# Altium PCB T1_MODIFYV1_0527.PCBDOC (part 1 of 6)
Units mm, origin at the board's own origin, x right, y up, seen from the top; angles counter-clockwise.
Board outline 1320.8 x 844.04 mm, 2 copper layers (Top Layer, Bottom Layer); 219 components, 215 nets, 1393 pads, 492 vias.
Unrouted connection lines stored in the file: 60.
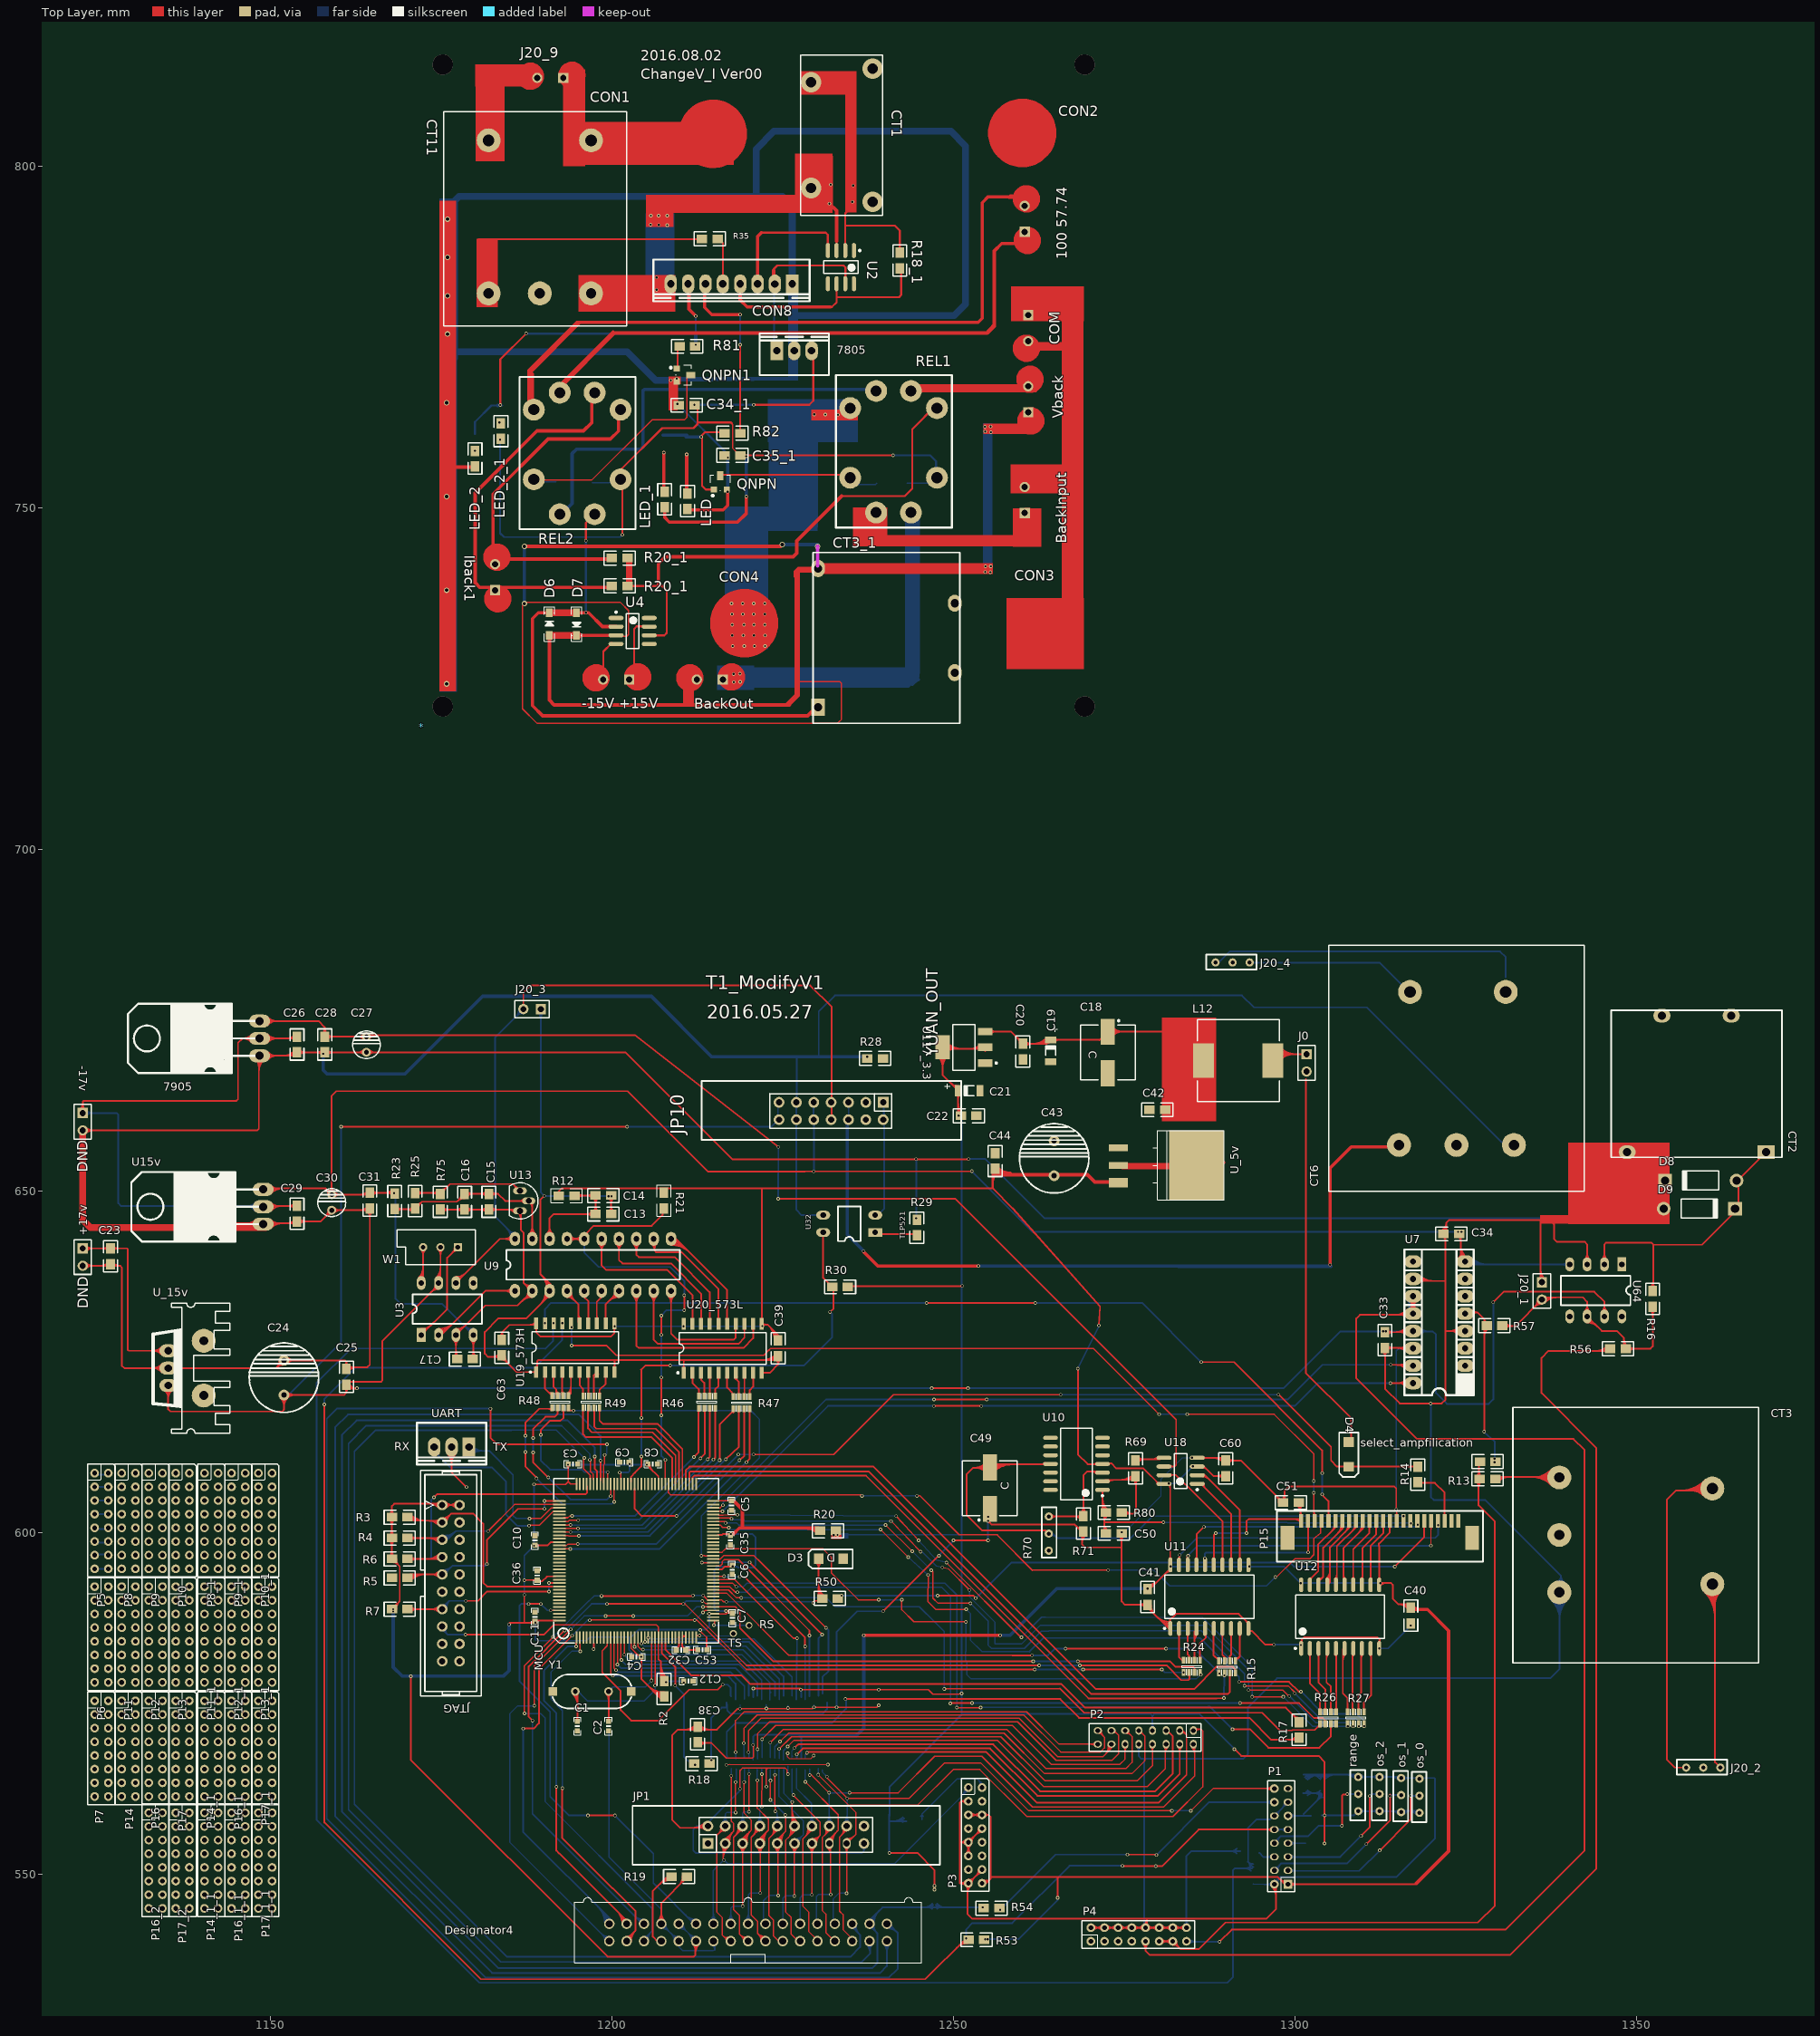
[diagram p0: Top Layer view]
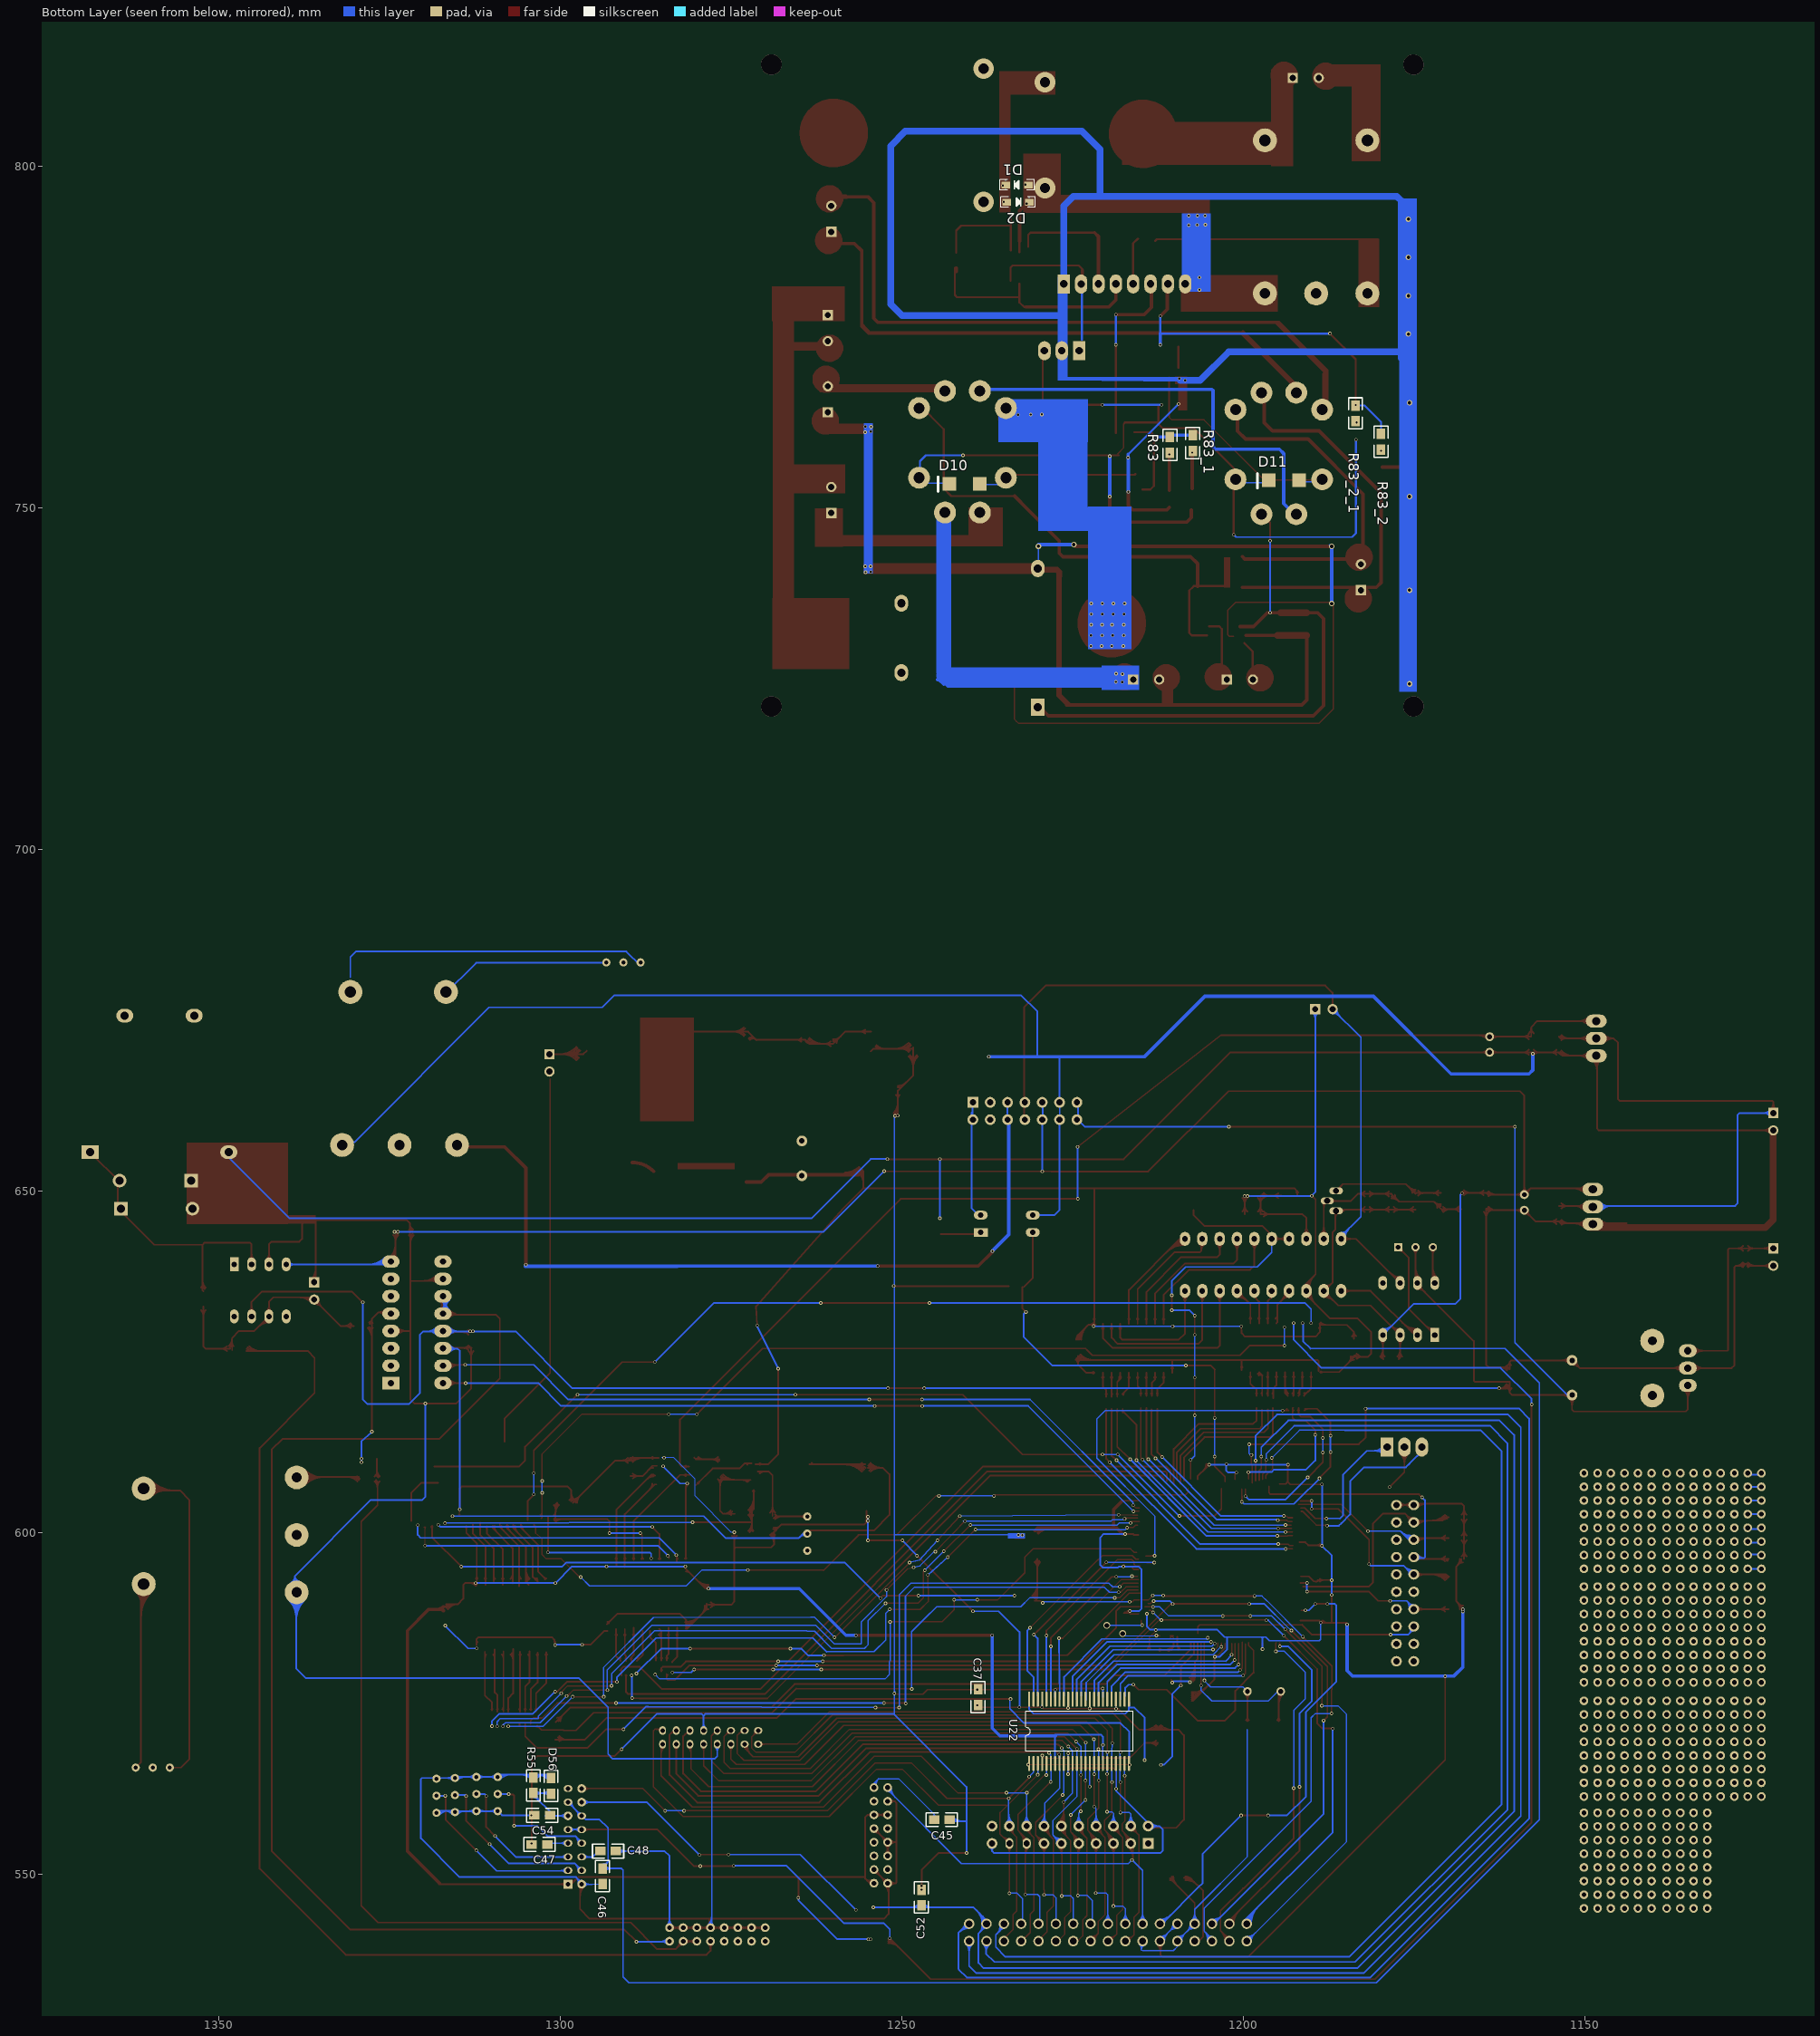
[diagram p1: Bottom Layer view, seen from below]

## Layer stack, top to bottom
Top Layer: signal copper 0.0356
Dielectric: dielectric 0.32, FR-4, Dk 4.8
Bottom Layer: signal copper 0.0356

## Board outline
476.758,980.821 1793.621,980.821 1795.526,978.916 1795.526,136.779 496.316,136.779 476.758,156.337 474.726,158.369 474.726,976.884

## Design rules (kind name [scope] priority, off if disabled: settings)
Clearance [All] p1: gap=0.254
PolygonConnect [All] p1: connectstyle=Relief reliefconductorwidth=0.254 reliefentries=4 polygonreliefangle="90 Angle"
RoomDefinition T1 [InComponentClass('T1')] p1: confinementstyle=ConfineIn formatcopy=TRUE lockcomponents=FALSE outline 0,0 50.8,0 50.8,25.4 0,25.4
RoutingVias [All] p1: holewidth=0.711 width=1.27 viastyle="Through Hole" minholewidth=0.711 minwidth=1.27 maxholewidth=0.711 maxwidth=1.27
SilkscreenOverComponentPads [All] p1: minsilkscreentomaskgap=0.254
SolderMaskExpansion [All] p1: expansion=0.102
TestPointUsage [All] p1: valid=0 allowmultiple=FALSE
Testpoint [All] p1: side=15 testpointundercomponent=TRUE minsize=1.016 maxsize=2.54 preferedsize=1.524 minholesize=0 maxholesize=1.016 preferedholesize=0.813 testpointgrid=0.025 style=1023 order=0-112345678
Width [All] p1: maxlimit=1 minlimit=0.1 preferedwidth=0.254 minimp=50.000000 maximp=50.000000 favimp=50.000000
23 further rules are at their usual default settings.

## Classes and differential pairs
component class T1: 7905 +17v -17v C1 C2 C3 C4 C5 C6 C7 C8 C9 C10 C11 C12 C13 C14 C15 C16 C17 C18 C19 C20 C21 C22 C23 C24 C25 C26 C27 C28 C29 C30 C31 C33 C34 C35 C36 C37 C38 C39 C40 C41 C42 C43 C44 C45 C46 C47 C48 C49 C50 C51 C52 C60 C63 CT2 CT3 D3 D8 D9 J0 J20_1 J20_2 J20_3 JP1 JTAG L12 MCU P1 P2 P3 P4 P15 R1 R2 R3 R4 R6 R7 R12 R13 R15 R16 R17 R19 R20 R23 R24 R25 R26 R27 R28 R46 R47 R48 R49 R50 R55 R56 R69 R70 R71 R75 R80 T1 TFTLCD1 U3 U7 U9 U10 U11 U12 U13 U15v U18 U19 U19_573H U20_573L U22 U64 U117_3.3 U_5v U_15v U_-5v uart W1 Y1

## Components (designator, comment, footprint, x,y, rotation, side; value= is the part's Value field where it differs from the comment)
"100 57.74" "Back" TWOPOWINT 1260.384,790.45 r90 top
7805 "Comment" CON3 1224.102,773.049 r0 top
7905 "7905" TO220H 1148.385,672.389 r90 top (schematic designator U_-5v)
* "Rect" RECTANGLE 1172.163,717.983 r0 top locked
+17v "k TX" HDR1X2 1122.477,641.655 r270 top (schematic designator J2)
"-15V +15V" "ac" TWOPOWINT 1202.472,724.918 r180 top
-17v "k TX" HDR1X2 1122.477,661.467 r270 top (schematic designator J3)
BackInput "ac" TWOPOWINT 1260.384,749.302 r90 top
BackOut "ac" TWOPOWINT 1216.188,724.918 r180 top
C1 "C" 0603P 1194.892,571.729 r90 top
C2 "C" 0603P 1199.464,571.729 r90 top
C3 "C" 0603P 1194.257,610.083 r180 top
C4 "C" 0603P 1203.528,581.889 r0 top
C5 "C" 0603P 1217.473,604.012 r90 top
C6 "C" 0603P 1217.549,594.614 r90 top
C7 "C" 0603P 1217.6,587.553 r90 top
C8 "C" 0603P 1205.941,610.083 r180 top
C9 "C" 0603P 1201.776,610.362 r0 top
C10 "C" 0603P 1188.669,598.907 r270 top
C11 "C" 0603P 1188.669,587.731 r270 top
C12 "C" 0603P 1211.148,578.333 r180 top
C13 "0.1" 0805 1197.559,646.684 r0 top
C14 "10u" 0805 1197.559,649.402 r0 top
C15 "0.1" 0805 1181.938,649.63 r270 top
C16 "10u" 0805 1178.382,649.63 r270 top
C17 "0.1" 0805 1177.29,625.45 r0 top
C18 "220u" C-RVE 1272.565,670.331 r270 top
C19 "10u" c-1206 1264.183,670.585 r270 top
C20 "0.1" 0805 1260.119,671.601 r270 top
C21 "10u" c-1206 1252.245,664.743 r0 top
C22 "0.1" 0805 1251.052,661.06 r0 top
C23 "0.1" 0805 1126.541,641.655 r270 top
C24 "220U" CD10 1151.941,620.192 r270 top
C25 "0.1" 0805 1161.085,621.716 r90 top
C26 "0.1" 0805 1153.846,670.357 r90 top
C27 "220U" CD4 1164.006,670.357 r270 top
C28 "0.1" 0805 1157.91,670.357 r90 top
C29 "0.1" 0805 1153.846,647.878 r270 top
C30 "220U" CD4 1158.926,647.243 r270 top
C31 "0.1" 0805 1164.514,649.783 r270 top
C32 "C" 0603P 1210.081,582.879 r180 top (schematic designator C7)
C33 "1u" 0805 1313.129,627.101 r90 top
C34 "1u" 0805 1321.687,643.787 r0 top
C34_1 "0.1" 0805 1212.037,765.073 r180 top (schematic designator C34)
C35 "C" 0603P 1217.295,598.932 r90 top
C35_1 "0.1" 0805 1218.728,757.734 r180 top (schematic designator C35)
C36 "C" 0603P 1189.025,593.776 r270 top
C37 "0.1" 0805 1238.91,574.827 r90 bottom
C38 "0.1" 0805 1212.494,569.366 r90 top
C39 "0.1" 0805 1224.28,625.881 r90 top
C40 "0.1u" 0805 1316.914,586.765 r90 top
C41 "0.1u" 0805 1278.382,589.483 r90 top
C42 "0.1" 0805 1280.947,661.949 r180 top
C43 "220U" CD10 1264.691,652.297 r270 top
C44 "0.1" 0805 1256.055,653.313 r90 top
C45 "0.1" 0805 1243.051,558.038 r0 bottom (schematic designator C37)
C46 "0.1" 0805 1293.876,548.615 r90 bottom (schematic designator C37)
C47 "0.1" 0805 1301.979,554.406 r0 bottom (schematic designator C37)
C48 "0.1" 0805 1291.92,553.441 r0 bottom (schematic designator C37)
C49 "100u/50V" C-RVE 1255.268,606.552 r90 top
C50 "0.1" 0805 1274.572,599.948 r180 top
C51 "0.1uF" 0805 1300.505,604.444 r180 top
C52 "0.1" 0805 1247.191,547.776 r270 bottom (schematic designator C37)
C53 "C" 0603P 1213.206,582.905 r180 top (schematic designator C4)
C54 "0.1" 0805 1301.572,558.673 r0 bottom (schematic designator C37)
C60 "0.1" 0805 1289.812,610.616 r270 top
C63 "0.1" 0805 1183.818,625.983 r90 top
COM "ac" TWOPOWINT 1260.892,778.258 r270 top
CON1 "CON1" POWINT 1218.728,808.738 r0 top
CON2 "CON1" POWINT 1264.006,808.863 r0 top
CON3 "CON1" POWINT 1266.988,735.586 r0 top
CON4 "CON1" POWINT 1223.3,737.11 r0 top
CON8 "CON8" CON8 1226.348,782.83 r180 top
CT1 "CT09" INDUCTER_1 1227.607,816.356 r90 top
CT2 "CT09" PCBComponent_1 1358.113,664.845 r180 top
CT3 "CT09" tra1 1338.656,591.312 r90 top
CT3_1 "CT09" INDUCTER_2 1240.064,732.03 r270 top (schematic designator CT3)
CT6 "CT09" tra1 1332.001,656.793 r180 top (schematic designator CT3)
CT11 "CT09" TRA1 1196.896,803.844 r180 top
D1 "1N4148" 1504D 1233.195,797.306 r180 bottom
D2 "1N4148" 1504D 1233.043,794.791 r0 bottom
D3 "3.3V" DO-36 1233.805,596.214 r180 top
D4 "3.3V" DO-36 1307.821,613.308 r270 top (schematic designator D3)
D6 "1N4148" 1504D 1190.788,733.046 r270 top
D7 "1N4148" 1504D 1194.756,733.021 r90 top
D8 "1N4148" DO-41 1359.357,651.586 r180 top
D9 "1N4148" DO-41 1359.154,647.471 r0 top
D10 "DIODE" DiodeSVC 1242.698,753.448 r0 bottom
D11 "DIODE" DiodeSVC 1195.962,753.956 r0 bottom
D56 "0.1" 0805 1301.42,561.823 r90 bottom (schematic designator C37)
Designator4 "Comment" IDC34S 1199.566,540.258 r90 top
Iback1 "ac" TWOPOWINT 1182.853,737.997 r90 top (schematic designator Vback)
J0 "k TX" HDR1X2 1301.648,670.077 r270 top
J20_1 "DDL_BV" HDR1X2 1336.091,636.702 r270 top
J20_2 "ac" RESVR 1362.227,565.658 r180 top
J20_3 "ac" HDR1X2 1189.533,676.681 r180 top
J20_4 "ac" RESVR 1293.317,683.514 r180 top (schematic designator J20_2)
J20_9 "ac" TWOPOWINT 1192.832,812.988 r180 top
JP1 "TO_7606" IDC20_1 1225.474,555.752 r0 top
JP10 "YUAN_OUT" IDC14 1232.061,661.784 r180 top (schematic designator P13)
JTAG "" JTAG_20 1176.376,592.658 r270 top
L12 "100uH" L1212 1291.641,669.138 r0 top
LED "1K" 0805 1211.021,752.17 r270 top (schematic designator R81)
LED_1 "1K" 0805 1207.668,752.424 r270 top (schematic designator R81)
LED_2 "1K" 0805 1179.906,758.393 r270 top (schematic designator R81)
LED_2_1 "1K" 0805 1183.691,762.432 r270 top (schematic designator R81)
MCU "STM32F103ZET6" LQFP144 1194.765,584.683 r90 top
os_0 "ac" RESVR 1318.184,564.032 r270 top (schematic designator J20_2)
os_1 "ac" RESVR 1315.491,564.134 r270 top (schematic designator J20_2)
os_2 "ac" RESVR 1312.342,564.286 r270 top (schematic designator J20_2)
P1 "Part-A" PARTA 1298.931,548.589 r90 top
P2 "Part-B" PARTB 1285.082,571.078 r180 top
P3 "Part-C" Part-C 1252.134,562.729 r270 top
P4 "Part-D" Part-D 1270.067,540.229 r0 top
P5 "Part-C" Part-C 1124.22,608.754 r270 top (schematic designator P3)
P6 "Part-C" Part-C 1124.22,592.142 r270 top (schematic designator P3)
P7 "Part-C" Part-C 1124.22,575.429 r270 top (schematic designator P3)
P8 "Part-C" Part-C 1128.182,608.754 r270 top (schematic designator P3)
P8_1 "Part-C" Part-C 1140.298,608.754 r270 top (schematic designator P3)
P9 "Part-C" Part-C 1132.145,608.754 r270 top (schematic designator P3)
P9_1 "Part-C" Part-C 1144.261,608.754 r270 top (schematic designator P3)
P10 "Part-C" Part-C 1136.082,608.754 r270 top (schematic designator P3)
P10_1 "Part-C" Part-C 1148.198,608.754 r270 top (schematic designator P3)
P11 "Part-C" Part-C 1128.182,592.142 r270 top (schematic designator P3)
P11_1 "Part-C" Part-C 1140.298,592.142 r270 top (schematic designator P3)
P12 "Part-C" Part-C 1132.145,592.142 r270 top (schematic designator P3)
P12_1 "Part-C" Part-C 1144.261,592.142 r270 top (schematic designator P3)
P13 "Part-C" Part-C 1136.082,592.142 r270 top (schematic designator P3)
P13_1 "Part-C" Part-C 1148.198,592.142 r270 top (schematic designator P3)
P14 "Part-C" Part-C 1128.182,575.429 r270 top (schematic designator P3)
P14_1 "Part-C" Part-C 1140.298,575.429 r270 top (schematic designator P3)
P14_1_1 "Part-C" Part-C 1140.298,559.046 r270 top (schematic designator P3)
P15 "SED1335" LCD_CM 1297.534,602.717 r0 top
P16 "Part-C" Part-C 1132.145,575.429 r270 top (schematic designator P3)
P16_1 "Part-C" Part-C 1144.261,575.429 r270 top (schematic designator P3)
P16_1_1 "Part-C" Part-C 1144.261,559.046 r270 top (schematic designator P3)
P16_2 "Part-C" Part-C 1132.145,559.046 r270 top (schematic designator P3)
P17 "Part-C" Part-C 1136.082,575.429 r270 top (schematic designator P3)
P17_1 "Part-C" Part-C 1148.198,575.429 r270 top (schematic designator P3)
P17_1_1 "Part-C" Part-C 1148.198,559.046 r270 top (schematic designator P3)
P17_2 "Part-C" Part-C 1136.082,559.046 r270 top (schematic designator P3)
QNPN "NPN1" SOT-23 1214.664,753.874 r90 top
QNPN1 "NPN1" SOT-23 1210.6,770.638 r0 top
R2 "R" 0805 1207.592,578.333 r270 top
R3 "10K" 0805 1167.74,602.31 r0 top
R4 "10K" 0805 1167.74,599.262 r0 top
R5 "10K" 0805 1167.74,593.42 r0 top
R6 "10K" 0805 1167.74,596.214 r0 top
R7 "10K" 0805 1167.74,588.848 r0 top
R12 "100" 0805 1192.174,649.376 r0 top
R13 "0K" 0805 1329.284,607.924 r180 top
R14 "0K" 0805 1317.93,609.702 r270 top (schematic designator R13)
R15 "470" 8P4R_0603 1288.834,579.501 r90 top
R16 "1K" 0805 1352.321,635.406 r270 top
R17 "470" 0805 1300.556,570.027 r90 top
R18 "470" 0805 1214.247,566.242 r180 top
R18_1 "1K" 0805 1242.096,787.402 r270 top (schematic designator R18)
R19 "470" 0805 1210.945,549.707 r180 top (schematic designator R18)
R20 "0" 0805 1230.452,600.329 r0 top
R20_1 "1K" 0805 1199.932,742.698 r0 top (schematic designator R20)
R20_1 "200" 0805 1199.932,738.634 r0 top
R21 "100" 0805 1207.567,649.783 r270 top (schematic designator R12)
R23 "1k" 0805 1168.146,649.707 r270 top
R24 "470" 8P4R_0603 1283.653,579.577 r90 top
R25 "2k" 0805 1171.143,647.471 r90 top
R26 "470" 8P4R_0603 1303.604,572.059 r90 top
R27 "470" 8P4R_0603 1307.668,572.059 r90 top
R28 "0" 0805 1239.622,669.468 r180 top
R29 "0" 0805 1244.6,645.846 r270 top (schematic designator R28)
R30 "0" 0805 1232.205,636.016 r0 top (schematic designator R28)
R35 "0K" 0805 1213.14,789.434 r0 top
R46 "33" 8P4R_0603 1212.672,618.261 r90 top
R47 "33" 8P4R_0603 1217.727,618.185 r90 top
R48 "33" 8P4R_0603 1191.184,618.312 r90 top
R49 "33" 8P4R_0603 1195.73,618.287 r90 top
R50 "470" 0805 1233.018,590.423 r180 top
R53 "0.1" 0805 1254.455,540.461 r180 top (schematic designator C37)
R54 "0.1" 0805 1256.665,545.084 r180 top (schematic designator C37)
R55 "0.1" 0805 1304.011,561.924 r90 bottom (schematic designator C37)
R56 "0" 0805 1348.384,626.974 r180 top
R57 "0" 0805 1330.3,630.352 r180 top (schematic designator R56)
R69 "47K" 0805 1276.604,610.616 r270 top
R70 "RESVR" RESVR 1263.904,597.408 r90 top
R71 "47K" 0805 1268.984,602.488 r270 top
R75 "3k" 0805 1174.826,649.63 r270 top
R80 "15K" 0805 1274.572,602.996 r180 top
R81 "1K" 0805 1212.124,773.686 r180 top
R82 "1K" 0805 1218.728,760.986 r180 top
R83 "1K" 0805 1210.818,758.139 r90 bottom (schematic designator R82)
R83_1 "1K" 0805 1207.465,758.393 r90 bottom (schematic designator R82)
R83_2 "1K" 0805 1179.906,758.596 r90 bottom (schematic designator R82)
R83_2_1 "1K" 0805 1183.64,762.737 r90 bottom (schematic designator R82)
range "ac" RESVR 1309.218,564.286 r270 top (schematic designator J20_2)
REL1 "RELAY1" N4099-5D 1238.634,754.464 r0 top
REL2 "RELAY2" N4099-5D 1192.312,754.222 r0 top
select_ampfilication "0K" 0805 1329.309,610.438 r180 top (schematic designator R13)
U2 "OP07CP" SOP127P600X175-8N 1233.475,785.292 r270 top
U3 "OP07" DIP8 1172.032,628.98 r90 top
U4 "OP07CP" SOP127P600X175-8N 1202.98,732.03 r0 top
U7 "PGA204" DIP16 1324.864,621.944 r90 top
U9 "AD7545" DIP20 1185.748,635.432 r90 top
U10 "LM324" SOP-14 1267.968,610.108 r180 top
U11 "74HC573" SO20-7.5 1287.424,590.677 r90 top
U12 "74HC573" SO20-7.5 1306.576,587.756 r90 top
U13 "431" 29-04 1186.485,648.614 r180 top
U15v "7915" TO220H 1148.893,647.751 r90 top
U18 "X9C503" SOP127P600X175-8N 1283.208,609.092 r180 top
U19_573H "74HCT573" M20D 1194.587,627.126 r0 top
U20_573L "74HCT573" M20D 1216.177,627.024 r0 top
U22 "SN74ALVC164245" SSOP48 1231.417,566.268 r90 bottom
U32 "TLP521" DIP4 1238.504,643.992 r180 top (schematic designator U30)
U64 "OP07CP" DIP8 1347.8,639.318 r270 top
U117_3.3 "LM1117-33" SOT223 1251.483,671.093 r90 top
U_5v "LD1086D2M33" D2PAK/A 1285.519,653.821 r180 top
U_15v "LD1086D2M33" TO220F 1137.59,624.129 r270 top
UART "Comment" CON3 1179.017,612.572 r180 top
Vback "ac" TWOPOWINT 1260.892,764.034 r90 top
W1 "50K" VR5 1174.852,641.833 r180 top
Y1 "XTAL" XTAL_US 1199.464,576.809 r180 top

## Footprints (in the part's own frame and the unit in brackets; to place one, negate y for a bottom-side part, rotate by r counter-clockwise, add the part's x,y. Pads: shape width x height; smd on the part's side, far side on the other; paste and mask are expansions set on the pad)
8P4R_0603 [mm]
  rect 1x0.5 smd: 1(0,0) 2(0,-0.8) 3(0,-1.6) 4(0,-2.4) 5(1.778,-2.4) 6(1.778,-1.6) 7(1.778,-0.8) 8(1.778,0)
  silkscreen extent -0.43,-2.67 2.18,0.25
29-04 [mm] "TO, Flat Index; 3 In-Line, Axial Leads; Body Dia. 4.8mm; Leads 0.48 x 0.51 mm (max)"
  oval 2x1 hole 0.9: 1(0,-1.47) 3(0,1.47)
  oval 1.9x1 hole 0.9: 2(-1.288,0)
  silkscreen extent -2.65,-2.65 1.55,2.65
0603P [mil]
  rect 30x30 smd: 1(-27,0) 2(27.5,-0.06)
  silkscreen extent -50,-20 50,20
0805 [mil]
  rect 60x50 smd: 1(0,0) 2(90,0)
  silkscreen extent -45,-40 135,40
1504D [mil]
  rect 50x40 smd: 1(65,0) 2(-65,0)
  silkscreen extent -99,-30 100,30
c-1206 [mm] "Chip Inductor, 2-Leads, Body 3.2x1.6mm, IPC Medium Density"
  rect 1x1.7 smd: 1(-1.6,0) 2(1.6,0)
  silkscreen extent -3.56,-0.75 0.7,1.02, body extent -1.6,-0.8 1.6,0.8, height 0.6
C-RVE [mm] "Precision Wire Wound Inductor, 2-Leads, Body 8.0x8.0mm, IPC Medium Density"
  rect 3.8x2.05 smd: 1(-3.048,0) 2(3.048,0)
  silkscreen extent -4.77,-4 4,4, body extent -4,-4 4,4, height 10.3
CD4 [mm]
  round 1.3 hole 0.7: 1(0,0) 2(-2.286,0)
  silkscreen extent -3.16,-2.04 0.92,2.04
CD10 [mil]
  round 62 hole 31.5: 1(0,0) 2(-200,0)
  silkscreen extent -300,-200 100,200
CON3 [mil]
  rect 72x110 hole 43.31: 1(0,0)
  oval 72x110 hole 43.31: 2(100,0) 3(200,0)
  silkscreen extent -100,-140 300,100
CON8 [mm]
  rect 1.8x2.8 hole 1.1: 1(0,0)
  oval 1.8x2.8 hole 1.1: 2(2.54,0.02) 3(5.08,0) 4(7.62,0) 5(10.16,0) 6(12.7,0) 7(15.24,0) 8(17.78,0)
  silkscreen extent -2.54,-3.56 20.32,2.54
D2PAK/A [mm]
  rect 2.8x1 smd: 1(11.4,-2.54) 2(11.4,0)
  rect 8x10.2 smd: 2(0,0)
  rect 2.8x1.42 smd: 3(11.4,2.54)
  silkscreen extent -4.06,-5.08 6.35,5.08
DiodeSVC [mm]
  rect 2x2 smd: 1(-4.064,-0.127) 2(0.381,-0.127)
  silkscreen extent 2.03,-1.14 2.03,1.02
DIP4 [mil]
  rect 80x50 hole 32: 1(0,0)
  oval 80x50 hole 32: 2(0,-100) 3(300,-100) 4(300,0)
  silkscreen extent 85,-150 215,50
DIP8 [mil]
  rect 80x50 hole 32: 1(0,0)
  oval 80x50 hole 32: 2(0,-100) 3(0,-200) 4(0,-300) 5(300,-300) 6(300,-200) 7(300,-100) 8(300,0)
  silkscreen extent 65,-350 235,50
DIP16 [mm]
  rect 1.829x2.54 hole 0.9: 1(0,0)
  oval 1.829x2.54 hole 0.9: 2(2.54,0) 3(5.08,0) 4(7.62,0) 5(10.16,0) 6(12.7,0) 7(15.24,0) 8(17.78,0) 9(17.78,7.62) 10(15.24,7.62) 11(12.7,7.62) 12(10.16,7.62) 13(7.62,7.62) 14(5.08,7.62) 15(2.54,7.62) 16(0,7.62)
  silkscreen extent -1.78,-1.27 19.56,8.89
DIP20 [mil]
  oval 80x60 hole 32: 1(0,0) 2(0,-100) 3(0,-200) 4(0,-300) 5(0,-400) 6(0,-500) 7(0,-600) 8(0,-700) 9(0,-800) 10(0,-900) 11(300,-900) 12(300,-800) 13(300,-700) 14(300,-600) 15(300,-500) 16(300,-400) 17(300,-300) 18(300,-200) 19(300,-100) 20(300,0)
  silkscreen extent 65,-950 235,50
DO-36 [mm]
  rect 1.4x1.5 smd: 1(0,0) 2(3.6,0)
  silkscreen extent -1.4,-1.4 5.08,1.4
DO-41 [mm] "Diode, Axial; Body 5.2 x 2.7 mm (LxDia. max), Lead Dia. 0.86 mm (max)"
  round 2 hole 1.2: 1(-5.23,0)
  rect 2x2 hole 1.2: 2(5.23,0)
  silkscreen extent -2.65,-1.41 2.74,1.4
HDR1X2 [mm] "Connector; Header; 2 Position"
  rect 1.5x1.5 hole 0.9: 1(0,0)
  round 1.5 hole 0.9: 2(2.54,0)
  silkscreen extent -1.27,-1.27 3.81,1.27
IDC14 [mm]
  rect 1.575x1.575 hole 0.9: 1(-7.601,-1.25)
  round 1.575 hole 0.9: 2(-7.601,1.29) 3(-5.061,-1.25) 4(-5.061,1.29) 5(-2.521,-1.25) 6(-2.521,1.29) 7(0.019,-1.25) 8(0.019,1.29) 9(2.559,-1.25) 10(2.559,1.29) 11(5.099,-1.25) 12(5.099,1.29) 13(7.639,-1.25) 14(7.639,1.29)
  silkscreen extent -19,-4.35 19,4.25
IDC20_1 [mm]
  rect 1.575x1.575 hole 0.9: 1(-11.476,-1.2)
  round 1.575 hole 0.9: 2(-11.476,1.34) 3(-8.936,-1.2) 4(-8.936,1.34) 5(-6.396,-1.2) 6(-6.396,1.34) 7(-3.856,-1.2) 8(-3.856,1.34) 9(-1.316,-1.2) 10(-1.316,1.34) 11(1.224,-1.2) 12(1.224,1.34) 13(3.764,-1.2) 14(3.764,1.34) 16(6.304,1.34) 18(8.844,1.34) 19(11.384,-1.2) 20(11.384,1.34)
  oval 1.2x1.575 hole 0.9: 15(6.304,-1.2)
  oval 1.15x1.575 hole 0.9: 17(8.844,-1.2)
  silkscreen extent -22.5,-4.3 22.5,4.3
IDC34S [mil]
  round 60 hole 40: bl(100,-500) clk(0,0) cs(100,-1600) d0(0,-1400) d1(100,-1300) d2(0,-1300) d3(100,-1200) d4(0,-1200) d5(100,-1100) d6(0,-1100) d7(100,-1000) d8(0,-1000) d9(100,-900) d10(0,-900) d11(100,-800) d12(0,-800) d13(100,-700) d14(0,-700) d15(100,-600) gnd(0,-400) gnd(0,-600) gnd(100,-300) mi(100,-200) mo(0,-200) nc(0,-100) pen(100,-100) rd(0,-1500) rs(0,-1600) rst(100,-1400) tcs(100,0) v5(0,-300) vdd(0,-500) vdd(100,-400) wr(100,-1500)
  silkscreen extent -125,-1800 250,200
INDUCTER_1 [mm]
  silkscreen extent -23.49,-12 0.01,0
INDUCTER_2 [mm]
  rect 2.5x2 hole 1.2: 1(11.176,-9.919)
  oval 2.5x2 hole 1.2: 2(-9.144,-9.919) 3(-4.064,10.071) 4(6.096,10.071)
  silkscreen extent -11.48,-10.67 13.52,10.83
JTAG_20 [mm]
  oval 1.5x1.575 hole 0.9: 1(-11.43,-1.27) 2(-11.43,1.27) 3(-8.89,-1.27) 4(-8.89,1.27) 5(-6.35,-1.27) 6(-6.35,1.27) 7(-3.81,-1.27) 8(-3.81,1.27) 9(-1.27,-1.27) 10(-1.27,1.27) 11(1.27,-1.27) 12(1.27,1.27) 13(3.81,-1.27) 14(3.81,1.27) 15(6.35,-1.27) 16(6.35,1.27) 17(8.89,-1.27) 18(8.89,1.27) 19(11.43,-1.27) 20(11.43,1.27)
  silkscreen extent -16.51,-4.45 16.51,4.45
L1212 [mm] "Precision Wire Wound Inductor, 2-Leads, Body 12.0x12.0mm, IPC Medium Density"
  rect 3x5.05 smd: 1(-5.075,0) 2(5.075,0)
  silkscreen extent -6,-6 6,6, body extent -6,-6 6,6, height 8
LCD_CM [mm] "LCD_CM"
  rect 2x3.5 smd: 0(1.331,-3.41) 0(28.331,-3.41)
  rect 0.6x2 smd: 1(3.331,-0.957) 2(4.331,-0.957) 3(5.331,-0.957) 4(6.331,-0.957) 5(7.331,-0.957) 6(8.331,-0.957) 7(9.331,-0.957) 8(10.331,-0.957) 9(11.331,-0.957) 10(12.331,-0.957) 11(13.331,-0.957) 12(14.331,-0.957) 13(15.331,-0.957) 14(16.331,-0.957) 15(17.331,-0.957) 16(18.331,-0.957) 17(19.331,-0.957) 18(20.331,-0.957) 19(21.331,-0.957) 20(22.331,-0.957) 21(23.331,-0.957) 22(24.331,-0.957) 23(25.331,-0.957) 24(26.331,-0.957)
  silkscreen extent -0.25,-6.91 29.97,0.51
LQFP144 [mm]
  rect 1.8x0.254 smd: 1(-0.009,0.001) 2(-0.009,-0.499) 3(-0.009,-0.999) 4(-0.009,-1.499) 5(-0.009,-1.999) 6(-0.009,-2.499) 7(-0.009,-2.999) 8(-0.009,-3.499) 9(-0.009,-3.999) 10(-0.009,-4.499) 11(-0.009,-4.999) 12(-0.009,-5.499) 13(-0.009,-5.999) 14(-0.009,-6.499) 15(-0.009,-6.999) 16(-0.009,-7.499) 17(-0.009,-7.999) 18(-0.009,-8.499) 19(-0.009,-8.999) 20(-0.009,-9.499) 21(-0.009,-9.999) 22(-0.009,-10.499) 23(-0.009,-10.999) 24(-0.009,-11.499) 25(-0.009,-11.999) 26(-0.009,-12.499) 27(-0.009,-12.999) 28(-0.009,-13.499) 29(-0.009,-13.999) 30(-0.009,-14.499) 31(-0.009,-14.999) 32(-0.009,-15.499) 33(-0.009,-15.999) 34(-0.009,-16.499) 35(-0.009,-16.999) 36(-0.009,-17.499) 73(22.491,-17.499) 74(22.491,-16.999) 75(22.491,-16.499) 76(22.491,-15.999) 77(22.491,-15.499) 78(22.491,-14.999) 79(22.491,-14.499) 80(22.491,-13.999) 81(22.491,-13.499) 82(22.491,-12.999) 83(22.491,-12.499) 84(22.491,-11.999) 85(22.491,-11.499) 86(22.491,-10.999) 87(22.491,-10.499) 88(22.491,-9.999) 89(22.491,-9.499) 90(22.491,-8.999) 91(22.491,-8.499) 92(22.491,-7.999) 93(22.491,-7.499) 94(22.491,-6.999) 95(22.491,-6.499) 96(22.491,-5.999) 97(22.491,-5.499) 98(22.491,-4.999) 99(22.491,-4.499) 100(22.491,-3.999) 101(22.491,-3.499) 102_ADBURY(22.491,-2.999) 103(22.491,-2.499) 104(22.491,-1.999) 105(22.491,-1.499) 106(22.491,-0.999) 107(22.491,-0.499) 108(22.491,0.001)
  rect 0.254x1.8 smd: 37(2.491,-19.999) 38(2.991,-19.999) 39(3.491,-19.999) 40(3.991,-19.999) 41(4.491,-19.999) 42(4.991,-19.999) 43(5.491,-19.999) 44(5.991,-19.999) 45(6.491,-19.999) 46(6.991,-19.999) 47(7.491,-19.999) 48(7.991,-19.999) 49(8.491,-19.999) 50(8.991,-19.999) 51(9.491,-19.999) 52(9.991,-19.999) 53(10.491,-19.999) 54(10.991,-19.999) 55(11.491,-19.999) 56(11.991,-19.999) 57(12.491,-19.999) 58(12.991,-19.999) 59(13.491,-19.999) 60(13.991,-19.999) 61(14.491,-19.999) 62(14.991,-19.999) 63(15.491,-19.999) 64(15.991,-19.999) 65(16.491,-19.999) 66(16.991,-19.999) 67(17.491,-19.999) 68(17.991,-19.999) 69(18.491,-19.999) 70(18.991,-19.999) 71(19.491,-19.999) 72(19.991,-19.999) 109(19.991,2.501) 110(19.491,2.501) 111(18.991,2.501) 112(18.491,2.501) 113(17.991,2.501) 114(17.491,2.501) 115(16.991,2.501) 116(16.491,2.501) 117(15.991,2.501) 118(15.491,2.501) 119(14.991,2.501) 120(14.491,2.501) 121(13.991,2.501) 122(13.491,2.501) 123(12.991,2.501) 124(12.491,2.501) 125(11.991,2.501) 126(11.491,2.501) 127(10.991,2.501) 128(10.491,2.501) 129(9.991,2.501) 130(9.491,2.501) 131(8.991,2.501) 132(8.491,2.501) 133(7.991,2.501) 134(7.491,2.501) 135(6.991,2.501) 136(6.491,2.501) 137(5.991,2.501) 138(5.491,2.501) 139(4.991,2.501) 140(4.491,2.501) 141(3.991,2.501) 142(3.491,2.501) 143(2.991,2.501) 144(2.491,2.501)
  silkscreen extent -0.81,-20.8 23.29,3.3
M20D [mm] "Small Outline; 20 Leads; Body Width 5.3 mm; Pitch 1.27 mm"
  rect 0.6x1.7 smd: 1(-5.715,-3.575) 2(-4.445,-3.575) 3(-3.175,-3.575) 4(-1.905,-3.575) 5(-0.635,-3.575) 6(0.635,-3.575) 7(1.905,-3.575) 8(3.175,-3.575) 9(4.445,-3.575) 10(5.715,-3.575) 11(5.715,3.575) 12(4.445,3.575) 13(3.175,3.575) 14(1.905,3.575) 15(0.635,3.575) 16(-0.635,3.575) 17(-1.905,3.575) 18(-3.175,3.575) 19(-4.445,3.575) 20(-5.715,3.575)
  silkscreen extent -6.69,-3.7 6.35,2.33
N4099-5D [mm]
  round 3.2 hole 1.6: 1(0,-5.1) 2(-3.8,10.2) 3(0,12.7) 4(5.1,-5.1) 5(8.9,10.2) 6(5.1,12.7) 8(8.9,0)
  round 3.2 hole 1.6 paste+0: 7(-3.8,0)
  silkscreen extent -5.9,-7.29 11.08,15.01
Part-C [mm] "Part-C"
  round 1.27 hole 0.7: 33(0,0) 34(0,2) 35(2,0) 36(2,2) 37(4,0) 38(4,2) 39(6,0) 40(6,2) 41(8,0) 42(8,2) 43(10,0) 44(10,2) 45(12,0) 46(12,2) 47(14,0) 48(14,2)
  silkscreen extent -1.32,-1 15.19,3
Part-D [mm] "Part-D"
  round 1.27 hole 0.7: 49(0,0) 50(0,2) 51(2,0) 52(2,2) 53(4,0) 54(4,2) 55(6,0) 56(6,2) 57(8,0) 58(8,2) 59(10,0) 60(10,2) 61(12,0) 62(12,2) 63(14,0) 64(14,2)
  silkscreen extent -1.32,-1 15.19,3
PARTA [mm] "PARTA"
  rect 1.27x1.27 hole 0.7: 1(0,0)
  round 1.27 hole 0.7: 2(0,2) 11(10,0) 14(12,2) 16(14,2)
  oval 1x1.27 hole 0.7: 3(2,0) 4(2,2) 5(4,0) 6(4,2) 7(6,0) 8(6,2) 9(8,0) 10(8,2) 12(10,2) 13(12,0) 15(14,0)
  silkscreen extent -1.12,-1 15.14,3
PARTB [mm] "PARTB"
  oval 1x1.27 hole 0.7: 17(0,0) 18(0,2) 19(2,0) 20(2,2) 21(4,0) 22(4,2) 23(6,0) 24(6,2) 26(8,2) 28(10,2)
  oval 1x1.2 hole 0.7: 25(8,0)
  oval 1.2x1 hole 0.7: 27(10,0) 29(12,0) 30(12,2) 31(14,0) 32(14,2)
  silkscreen extent -1.12,-1 15.27,3
PCBComponent_1 [mm]
  rect 2.5x2 hole 1.2: 1(-10.795,9.106)
  oval 2.5x2 hole 1.2: 2(9.525,9.106) 3(4.445,-10.884) 4(-5.715,-10.884)
  silkscreen extent -13.14,-11.64 11.87,9.86
POWINT [mm]
  Top Layer circle w5: c-3.984,-3.937 r2.5
RECTANGLE [mm]
RESVR [mm]
  round 1.2 hole 0.6: 0(0,0) 1(2.5,0) 2(5,0)
  silkscreen extent -1.02,-1.14 6.35,1.02
SO20-7.5 [mm] "SOIC, 20-Leads, Body 13.0x7.4mm (max), Pitch 1.27mm, IPC Medium Density"
  oval 2.15x0.6 smd: 1(-4.65,5.715) 2(-4.65,4.445) 3(-4.65,3.175) 4(-4.65,1.905) 5(-4.65,0.635) 6(-4.65,-0.635) 7(-4.65,-1.905) 8(-4.65,-3.175) 9(-4.65,-4.445) 10(-4.65,-5.715) 11(4.65,-5.715) 12(4.65,-4.445) 13(4.65,-3.175) 14(4.65,-1.905) 15(4.65,-0.635) 16(4.65,0.635) 17(4.65,1.905) 18(4.65,3.175) 19(4.65,4.445) 20(4.65,5.715)
  silkscreen extent -4.77,-6.5 3.18,6.69, body extent -3.7,-6.5 3.7,6.5, height 2.65
SOP127P600X175-8N [mm] "SOP, 8-Leads, Body 5.1x4.0mm (max), Pitch 1.27mm, IPC Medium Density"
  oval 2.2x0.6 smd: 1(-2.425,1.905) 2(-2.425,0.635) 3(-2.425,-0.635) 4(-2.425,-1.905) 5(2.425,-1.905) 6(2.425,-0.635) 7(2.425,0.635) 8(2.425,1.905)
  silkscreen extent -2.55,-2.55 0.93,2.88, body extent -2,-2.55 2,2.55, height 1.75
SOP-14 [mm] "SOP, 14-Leads, Body 10.5x5.6mm (max), Pitch 1.27mm, IPC Medium Density"
  oval 2.15x0.6 smd: 1(-3.8,3.81) 2(-3.8,2.54) 3(-3.8,1.27) 4(-3.8,0) 5(-3.8,-1.27) 6(-3.8,-2.54) 7(-3.8,-3.81) 8(3.8,-3.81) 9(3.8,-2.54) 10(3.8,-1.27) 11(3.8,0) 12(3.8,1.27) 13(3.8,2.54) 14(3.8,3.81)
  silkscreen extent -3.93,-5.25 2.33,5.25, body extent -2.8,-5.25 2.8,5.25, height 2
SOT223 [mm] "SOT-223/SC-73; 4 Leads; Body 6.7 x 7.3 mm, inc. leads (LxW max)"
  rect 1.1x2.15 smd: 1(-2.3,-3.1) 2(0,-3.1) 3(2.3,-3.1)
  rect 3.5x2.15 smd: 4(0,3.1)
  silkscreen extent -3.35,-4.85 3.35,1.63
SOT-23 [mil]
  rect 36x36 smd: 1(-45,-7.5) 2(-45,-82.5)
  rect 50x36 smd: 3(35,-45.5)
  silkscreen extent -80,-102 40,13
SSOP48 [mil]
  oval 87x12 smd: 1(0,0) 2(0,-25) 3(0,-50) 4(0,-75) 5(0,-100) 6(0,-125) 7(0,-150) 8(0,-175) 9(0,-200) 10(0,-225) 11(0,-250) 12(0,-275) 13(0,-300) 14(0,-325) 15(0,-350) 16(0,-375) 17(0,-400) 18(0,-425) 19(0,-450) 20(0,-475) 21(0,-500) 22(0,-525) 23(0,-550) 24(0,-575) 25(370,-575) 26(370,-550) 27(370,-525) 28(370,-500) 29(370,-475) 30(370,-450) 31(370,-425) 32(370,-400) 33(370,-375) 34(370,-350) 35(370,-325) 36(370,-300) 37(370,-275) 38(370,-250) 39(370,-225) 40(370,-200) 41(370,-175) 42(370,-150) 43(370,-125) 44(370,-100) 45(370,-75) 46(370,-50) 47(370,-25) 48(370,0)
  silkscreen extent 70,-600 300,20
TO220F [mm]
  oval 1.905x2.6 hole 1.1: 1(-2.54,-2.6) 2(0,-2.6) 3(2.54,-2.6)
  round 3.5 hole 1.3: 2(-4,2.6) 2(4,2.6)
  silkscreen extent -9.5,-4.8 9.5,6.4
TO220H [mm]
  oval 1.905x3.048 hole 1.2: 1(-2.54,0) 2(0,0) 3(2.54,0)
  silkscreen extent -5.08,0.76 5.08,19.3
tra1 [mm]
  round 3.5 hole 1.5: 1(0,0) 2(16.821,0) 8(8.4,0)
  round 3.5 hole 1.7: 3(1.2,-22.4) 4(15.2,-22.4)
  silkscreen extent -10.3,-29.2 27.08,6.8
TRA1 [mm]
  round 3.5 hole 1.5: 1(0,22.4) 2(15,22.4) 8(7.5,22.4)
  round 3.5 hole 1.7: 3(0,0) 4(15,0)
  silkscreen extent -5.21,-4.19 21.56,27.18
TWOPOWINT [mm]
  rect 1.5x1.5 hole 0.9: 1(0,0)
  round 1.5 hole 0.9: 2(3.81,0)
  Top Layer circle w2: c4.842,-0.254 r1
  Top Layer circle w2: c-1.254,-0.381 r1
VR5 [mm] "Potentiometer; 3 Leads"
  rect 1.2x1.2 hole 0.7: 1(-2.54,0)
  round 1.2 hole 0.7: 2(0,0) 3(2.54,0)
  silkscreen extent -5.08,-2.54 6.35,2.54
XTAL_US [mil]
  round 50 hole 28: 1(0,0) 2(192.13,0)
  rect 50x50 smd: ""(-130.32,0) ""(322.44,0)
  silkscreen extent -131,-98 323,98

## Part data
"100 57.74" "-15V +15V" BackInput BackOut COM Iback1 J20_1 J20_2 J20_3 J20_4 J20_9 os_0 os_1 os_2 range Vback: library part CON2, "Connector"
7905 U15v: library part VOLTREG
+17v -17v J0: library part "Header 2", "Header, 2-Pin"
C13 C14 C23 C25 C26 C28 C29 C31 C34_1 C35_1 C40 C41 C42 C44 C51: library part CAP, "Capacitor"
C15 C16 C17: library part Cap_5, "Capacitor"
C18 C24 C27 C30 C43: library part "CAPACITOR POL", "Capacitor"
C19 C21: library part Cap2, "Capacitor"
C20 C22 C33 C34 C37 C38 C39 C45 C46 C47 C48 C50 C52 C54 C60 C63 D56 R53 R54 R55: library part Cap, "Capacitor"
C49: library part "Cap Pol1", "Polarized Capacitor (Radial)"
CON1 CON2 CON3 CON4 CON8: "Connector"
D1 D2 D6 D7 D8 D9: library part "Diode 1N4007", "1 Amp General Purpose Rectifier"
D3 D4: library part "DIODE SCHOTTKY", "Schottky Diode"
D10 D11: "Diode"
JP1: library part "Header 10X2", "Header, 10-Pin, Dual row"
JP10: library part "Header 14", "Header, 14-Pin"
JTAG: library part JTAG
L12: library part INDUCTOR2
LED LED_1 LED_2 LED_2_1 R13 R14 R35 R50 R69 R71 R80 R81 R82 R83 R83_1 R83_2 R83_2_1 select_ampfilication: library part Res2, "Resistor"
P1 P2 P3 P4 P5 P6 P7 P8 P8_1 P9 P9_1 P10 P10_1 P11 P11_1 P12 P12_1 P13 P13_1 P14 P14_1 P14_1_1 P16 P16_1 P16_1_1 P16_2 P17 P17_1 P17_1_1 P17_2: library part "Header 16", "Header, 16-Pin"
P15: library part 26PIN
QNPN QNPN1: "NPN Transistor"
R3 R4 R5 R6 R7: library part R
R12 R21 R23 R25 R75: library part RES
R15 R24 R26 R27 R46 R47 R48 R49: library part RP4R
R16 R18_1 R20_1 R20_1 R56 R57: library part RES2
R17 R18 R19 R20 R28 R29 R30: library part Res
R70: "Potentiometer"
REL1 REL2: library part RELAY-SPDT
U2 U3 U4 U64: library part OP07CN, "Very Low Offset Single Bipolar Operational Amplifier"
U7: library part PGA205
U10: library part LM324AJ, "Quadruple Operational Amplifier"
U13: library part TL431ACLP, "Programmable Precision Reference"
U18: library part Component_1
U19_573H U20_573L: library part 74HC573
U22: library part IC_SN74ALVC164245
U32: library part TLP521-1
U117_3.3: library part LM1117
U_5v U_15v: library part LM1086
W1: library part RPot, "Potentiometer"
Y1: "Crystal Oscillator"

## Free pads (board coordinates)
  round 5 on Keep-Out: 2(1123.845,680.259) 2(1125.267,541.956) 2(1353.639,542.083) 2(1360.7,682.063)

## Via types
v1: diameter 0.5, hole 0.3, Top Layer to Bottom Layer, 470 vias
v2: diameter 0.8, hole 0.5, Top Layer to Bottom Layer, 12 vias
v3: diameter 3, hole 1.5, Top Layer to Bottom Layer, 4 vias
v4: diameter 3, hole 3, Top Layer to Bottom Layer, 4 vias
v5: diameter 1, hole 0.7, Top Layer to Bottom Layer, 2 vias

## Nets (pads, with @x,y where several pads share a name; then routed paths per layer and width w, separated by ;. In a path a pad name is that pad's centre, name@x,y a point inside that pad or via, vN(x,y) a via of type N, cw(c..) or ccw(c..) an arc to the next point about the centre after c; other vN are vias at no path point)
15J: P1.15
36J: P3.36
42J: P3.42
44J: P3.44
45J: P3.45
+15V: C24.1 C25.1 C33.2 JP10.14 U3.7 U7.13 U64.7 U_15v.3 W1.2 | length 435.7
  Top Layer w0.254: U_15v.3@1134.406,621.005 cw(c1132.997,619.596) 1134.99,619.596 cw(c1136.983,619.596) U_15v.3@1135.574,621.005 ; U_15v.3@1134.586,621.185 cw(c1133.61,620.209) 1134.99,620.209 cw(c1136.37,620.209) U_15v.3@1135.394,621.185 ; U_15v.3@1134.99,621.589 1134.99,618.093 1135.304,617.779 1151.687,617.779 1151.941,618.033 C24.1@1151.941,620.192 1160.704,620.192 1161.085,620.573 ; C24.1@1151.474,619.725 cw(c1150.346,618.597) 1151.941,618.597 cw(c1153.535,618.597) 1152.408,619.725 cw(c1153.535,618.597) 1153.535,620.192 cw(c1153.535,621.786) C24.1@1152.408,620.659 ; C24.1@1151.653,619.904 cw(c1150.96,619.211) 1151.941,619.211 cw(c1152.922,619.211) 1152.228,619.904 cw(c1152.922,619.211) 1152.922,620.192 cw(c1152.922,621.173) C24.1@1152.228,620.479 ; v1(1160.297,659.46) v1(1202.182,659.46) ; C25.1@1160.78,621.182 cw(c1160.323,620.573) 1161.085,620.573 ; C25.1@1161.085,621.589 ccw(c1161.795,621.911) 1161.795,621.132 ; C25.1@1161.316,621.694 ccw(c1162.189,622.09) 1162.189,621.132 ; C25.1@1161.39,621.182 ccw(c1161.847,620.573) 1161.085,620.573 ; C25.1@1161.491,621.132 1162.583,621.132 cw(c1162.583,622.269) C25.1@1161.547,621.799 ; v1@1162.516,621.132 ccw(c1162.516,621.3) v1@1162.636,621.181 ; 1173.488,635.262 cw(c1174.572,634.178) U3.7@1174.572,635.711 ; 1173.795,635.569 ccw(c1173.144,636.219) U3.7@1174.064,636.219 ; 1173.922,635.696 cw(c1174.572,635.045) U3.7@1174.572,635.965 ; U3.7@1174.213,637.34 ccw(c1172.671,638.882) 1174.852,638.882 ; U3.7@1174.393,637.161 ccw(c1173.284,638.269) 1174.852,638.269 ; U3.7@1174.471,636.6 1174.471,636.245 1166.317,628.091 1166.317,622.3 1166.139,622.122 1161.085,622.122 1161.085,620.573 ; W1.2@1174.517,641.498 cw(c1173.71,640.691) 1174.852,640.691 cw(c1175.994,640.691) W1.2@1175.186,641.498 ; U3.7@1174.572,636.6 1174.852,636.88 W1.2@1174.852,641.833 ; U3.7@1174.572,636.981 ccw(c1173.898,637.656) 1174.852,637.656 ; v1(1246.784,621.182) v1(1252.093,621.182) ; C33.2@1313.255,629.512 ccw(c1313.558,629.815) C33.2@1313.558,629.387 ; C33.2@1313.258,629.514 cw(c1313.129,629.516) C33.2@1313.129,629.387 1317.346,629.387 U7.13@1317.549,629.59 ; C33.2@1313.488,629.027 cw(c1314.356,628.16) 1314.356,629.387 cw(c1314.356,630.613) C33.2@1313.488,629.746 ; 1314.558,629.387 ccw(c1314.558,631.895) U7.13@1316.332,630.121 ; 1315.171,629.387 ccw(c1315.171,631.281) U7.13@1316.511,629.942 ; 1315.417,629.387 cw(c1315.417,628.093) U7.13@1316.332,629.008 ; 1315.785,629.387 ccw(c1315.785,630.668) U7.13@1316.691,629.762 ; v1(1328.979,633.755) 1330.528,635.305 1343.787,635.305 1345.26,633.832 U64.7@1345.26,631.698 ; U64.7@1344.901,632.438 ccw(c1344.034,633.305) 1345.26,633.305 ccw(c1346.487,633.305) U64.7@1345.619,632.438
  Bottom Layer w0.254: C24.1@1151.941,620.192 1152.601,620.192 1160.297,627.888 v1(1160.297,659.46) ; v1(1162.634,621.182) v1@1246.937,621.182 ; v1(1202.182,659.46) 1223.264,659.46 JP10.14@1224.674,660.87 ; v1(1252.093,621.182) 1298.27,621.182 1306.601,629.514 1320.114,629.514 1320.597,629.031 1320.597,620.497 1322.197,618.896 1328.318,618.896 1328.979,619.557 v1(1328.979,633.755) ; 1314.865,629.514 ccw(c1314.865,631.588) U7.13@1316.332,630.121 ; 1315.11,629.514 cw(c1315.11,627.786) U7.13@1316.332,629.008 ; 1315.478,629.514 ccw(c1315.478,630.975) U7.13@1316.511,629.942 ; 1315.723,629.514 cw(c1315.723,628.399) U7.13@1316.511,629.187 ; U7.13@1317.193,629.514 U7.13@1317.371,629.336 ; U7.13@1317.977,629.187 cw(c1318.765,628.399) 1318.765,629.514 ; U7.13@1317.977,629.942 ccw(c1319.01,630.975) 1319.01,629.514 ; U7.13@1318.156,629.008 cw(c1319.378,627.786) 1319.378,629.514 ; U7.13@1318.156,630.121 ccw(c1319.623,631.588) 1319.623,629.514
  other v1: 1312.85,629.514 1313.256,629.514
+17V: +17v.1 C23.1 U_15v.1 | length 40.3
  Top Layer w0.254: +17v.1@1122.477,641.655 C23.1@1126.541,641.655 1128.954,641.655 1129.081,641.528 1129.081,626.796 1129.208,626.669 U_15v.1@1134.99,626.669 ; +17v.1@1122.738,641.394 cw(c1123.368,640.764) 1123.368,641.655 cw(c1123.368,642.546) +17v.1@1122.738,641.916 ; +17v.1@1122.917,641.214 cw(c1123.981,640.151) 1123.981,641.655 cw(c1123.981,643.159) +17v.1@1122.917,642.095 ; C23.1@1126.182,641.296 ccw(c1125.314,640.428) 1125.314,641.655 ccw(c1125.314,642.881) C23.1@1126.182,642.014 ; C23.1@1126.9,641.296 cw(c1127.767,640.428) 1127.767,641.655 cw(c1127.767,642.881) C23.1@1126.9,642.014 ; U_15v.1@1134.059,626.085 ccw(c1132.649,624.676) 1132.649,626.669 ccw(c1132.649,628.662) U_15v.1@1134.059,627.253 ; U_15v.1@1134.238,626.265 ccw(c1133.263,625.289) 1133.263,626.669 ccw(c1133.263,628.049) U_15v.1@1134.238,627.073
-15V: C17.2 C30.2 C31.1 C34.2 R23.1 U3.4 U7.8 U15v.3 U64.4 | length 315.4
  Top Layer w0.254: U15v.3@1148.258,650.418 1158.037,650.418 ; U15v.3@1149.689,650.066 cw(c1150.537,649.218) 1150.537,650.418 cw(c1150.537,651.364) U15v.3@1149.868,650.695 ; U15v.3@1149.868,649.887 cw(c1151.151,648.604) 1151.151,650.418 cw(c1151.151,651.977) U15v.3@1150.048,650.875 ; U15v.3@1150.048,649.707 cw(c1151.764,647.991) 1151.764,650.418 ; C30.2@1158.403,649.53 ccw(c1157.153,649.534) 1158.037,650.418 ; C30.2@1158.556,649.899 ccw(c1157.663,650.791) 1158.926,650.791 ccw(c1160.188,650.791) 1159.296,649.899 ccw(c1160.188,650.791) 1160.188,649.529 ccw(c1160.188,648.266) C30.2@1159.296,649.159 ; C30.2@1158.924,650.052 cw(c1158.92,651.301) 1158.037,650.418 ; 1162.981,649.529 ccw(c1162.981,651.189) C31.1@1164.155,650.015 ; C31.1@1164.155,649.297 ccw(c1163.594,648.736) 1163.594,649.529 ccw(c1163.594,650.576) C31.1@1164.334,649.835 ; C31.1@1164.873,649.424 cw(c1165.74,648.556) 1165.74,649.783 cw(c1165.74,651.009) C31.1@1164.873,650.142 ; 1166.797,649.783 ccw(c1166.797,651.183) R23.1@1167.787,650.193 ; 1167.042,649.783 cw(c1167.042,648.73) R23.1@1167.787,649.474 ; 1167.41,649.783 ccw(c1167.41,650.569) R23.1@1167.966,650.013 ; R23.1@1168.146,649.707 1168.07,649.783 C31.1@1164.514,649.783 1164.26,649.529 C30.2@1158.926,649.529 ; U3.4@1179.293,628.24 cw(c1178.426,627.373) 1179.652,627.373 cw(c1180.879,627.373) U3.4@1180.011,628.24 ; C17.2@1179.344,625.809 ccw(c1178.599,626.553) 1179.652,626.553 ; C17.2@1179.576,625.45 1179.652,625.526 U3.4@1179.652,628.98 ; 1179.652,626.185 ccw(c1180.439,626.185) C17.2@1179.883,625.629 ; 1179.652,626.799 ccw(c1181.052,626.799) C17.2@1180.062,625.809 ; v1(1252.652,652.958) 1228.192,652.926 1213.993,652.907 1202.233,664.667 1159.586,664.667 1158.926,664.007 C30.2@1158.926,649.529 ; C34.2@1323.794,643.607 cw(c1322.804,642.617) 1324.204,642.617 ; U7.8@1323.952,640.281 ccw(c1323.343,640.89) 1324.204,640.89 ; C34.2@1323.973,643.787 cw(c1323.417,643.23) C34.2@1324.204,643.23 ; 1324.204,641.135 ccw(c1325.919,641.135) U7.8@1324.706,639.922 ; 1324.204,641.748 ccw(c1326.532,641.748) U7.8@1324.886,640.102 ; 1324.204,642.361 ccw(c1327.145,642.361) U7.8@1325.065,640.281 ; 1324.204,642.862 cw(c1325.257,642.862) C34.2@1324.512,643.607 ; C34.2@1324.204,643.636 1324.204,640.385 U7.8@1324.864,639.724 ; 1158.037,650.418 C30.2@1158.926,649.529
  Bottom Layer w0.254: v1(1168.07,649.757) 1168.273,649.554 1168.273,634.289 1169.01,633.552 1175.08,633.552 U3.4@1179.652,628.98 ; 1178.135,630.498 ccw(c1179.652,632.015) U3.4@1179.652,629.869 ; 1178.568,630.064 ccw(c1179.652,631.148) U3.4@1179.652,629.615 ; 1179.002,629.631 ccw(c1179.652,630.281) U3.4@1179.652,629.361 ; 1179.054,629.578 cw(c1178.838,629.361) U3.4@1179.144,629.361 ; v1(1229.512,652.932) 1229.512,660.629 ; v1(1252.652,652.958) 1261.542,644.068 v1(1324.331,644.068) ; U7.8@1324.635,639.318 U64.4@1340.18,639.318 ; U7.8@1325.238,639.742 ccw(c1326.262,640.767) 1326.262,639.318 ; U7.8@1325.417,639.922 ccw(c1326.875,641.38) 1326.875,639.318 ; U7.8@1325.597,640.102 ccw(c1327.488,641.993) 1327.488,639.318 ; U7.8@1325.776,639.168 cw(c1326.139,638.805) 1326.139,639.318 ; U7.8@1325.776,640.281 ccw(c1328.102,642.606) 1328.102,639.318 ; U64.4@1339.821,638.959 ccw(c1338.954,638.092) 1338.954,639.318 ccw(c1338.954,640.544) U64.4@1339.821,639.677
  other v1: 1323.823,644.068
-17V: 7905.2 -17v.1 C26.2 C29.1 U15v.2 | length 121.6
  Top Layer w0.254: -17v.1@1122.036,661.907 ccw(c1120.973,662.971) 1122.477,662.971 ccw(c1123.981,662.971) -17v.1@1122.917,661.907 ; -17v.1@1122.216,661.728 ccw(c1121.586,662.358) 1122.477,662.358 ccw(c1123.368,662.358) -17v.1@1122.738,661.728 ; -17v.1@1122.477,661.467 1122.477,663.118 1122.604,663.245 1144.956,663.245 1145.21,663.499 1145.21,671.754 1145.845,672.389 ; 7905.2@1147.224,671.81 ccw(c1145.845,670.455) 1145.845,672.389 ; 7905.2@1147.224,672.967 cw(c1145.845,674.323) 1145.845,672.389 ; 7905.2@1147.406,671.988 ccw(c1146.451,671.05) 1146.451,672.389 ccw(c1146.451,673.728) 7905.2@1147.406,672.789 ; U15v.2@1148.258,647.878 C29.1@1153.846,647.878 ; 7905.2@1149.36,671.985 cw(c1150.336,671.009) 1150.336,672.389 cw(c1150.336,673.769) 7905.2@1149.36,672.793 ; 7905.2@1149.54,671.805 cw(c1150.949,670.396) 1150.949,672.389 cw(c1150.949,674.382) 7905.2@1149.54,672.973 ; U15v.2@1149.689,647.526 cw(c1150.537,646.678) 1150.537,647.878 cw(c1150.537,648.824) U15v.2@1149.868,648.155 ; U15v.2@1149.868,647.347 cw(c1151.151,646.064) 1151.151,647.878 cw(c1151.151,649.437) U15v.2@1150.048,648.335 ; U15v.2@1150.048,647.167 cw(c1151.764,645.451) 1151.764,647.878 ; 1152.313,672.389 ccw(c1152.313,674.049) C26.2@1153.487,672.875 ; C29.1@1153.487,647.519 ccw(c1152.619,646.651) 1152.619,647.878 ccw(c1152.619,649.104) C29.1@1153.487,648.237 ; C26.2@1153.487,672.157 ccw(c1152.926,671.596) 1152.926,672.389 ccw(c1152.926,673.436) C26.2@1153.666,672.695 ; C26.2@1153.846,672.643 1153.592,672.389 1145.845,672.389
  Bottom Layer w0.254: -17v.1@1122.477,661.467 1127.43,661.467 1127.684,661.213 1127.684,648.259 1128.065,647.878 U15v.2@1148.258,647.878 ; -17v.1@1122.738,661.206 cw(c1123.368,660.576) 1123.368,661.467 cw(c1123.368,662.358) -17v.1@1122.738,661.728 ; -17v.1@1122.917,661.026 cw(c1123.981,659.963) 1123.981,661.467 cw(c1123.981,662.971) -17v.1@1122.917,661.907 ; 1146.022,647.878 cw(c1146.022,645.451) U15v.2@1147.738,647.167 ; U15v.2@1147.738,648.335 cw(c1146.635,649.437) 1146.635,647.878 cw(c1146.635,646.064) U15v.2@1147.917,647.347 ; U15v.2@1147.917,648.155 cw(c1147.248,648.824) 1147.248,647.878 cw(c1147.248,646.678) U15v.2@1148.097,647.526
-23V: C49.2 P15.16 R70.1 U10.11 | length 103
  Top Layer w0.254: 1252.916,609.524 ccw(c1252.916,611.952) C49.2@1254.633,610.235 ; 1253.284,609.524 cw(c1253.284,607.616) C49.2@1254.633,608.965 ; 1253.529,609.524 ccw(c1253.529,611.339) C49.2@1254.813,610.055 ; 1253.897,609.524 cw(c1253.897,608.229) C49.2@1254.813,609.145 ; 1254.143,609.524 ccw(c1254.143,610.725) C49.2@1254.992,609.876 ; C49.2@1255.014,609.524 1252.804,609.524 1251.864,608.584 1251.864,602.64 1254.15,600.354 1263.458,600.354 R70.1@1263.904,599.908 ; C49.2@1255.364,609.504 cw(c1256.639,608.229) 1256.639,610.032 ; C49.2@1255.395,610.032 U10.11@1263.574,610.032 ; C49.2@1255.544,609.324 cw(c1257.252,607.616) 1257.252,610.032 ; C49.2@1255.723,609.145 cw(c1257.865,607.003) 1257.865,610.032 ; C49.2@1255.903,608.965 cw(c1258.478,606.389) 1258.478,610.032 ; C49.2@1255.903,610.235 ccw(c1256.393,610.725) 1256.393,610.032 ; 1262.791,610.032 ccw(c1262.791,610.71) U10.11@1263.271,610.23
  Bottom Layer w0.254: R70.1@1263.899,599.943 cw(c1264.051,598.977) 1264.743,599.668 ; R70.1@1263.904,599.908 1264.503,599.908 1265.149,599.262 1275.893,599.262 1279.093,602.463 v1(1315.847,602.463) ; R70.1@1263.938,599.692 cw(c1264.147,598.368) 1265.095,599.316
/PAR: P1.6 | length 3.8
  Bottom Layer w0.254: 1294.74,553.161 1295.312,552.589 P1.6@1296.931,552.589 ; P1.6@1296.532,552.325 ccw(c1295.895,551.689) 1295.895,552.589 ccw(c1295.895,553.49) P1.6@1296.532,552.853
/STBY: P1.7 | length 4
  Bottom Layer w0.254: P1.7@1298.931,554.589 1301.49,554.589 ; P1.7@1299.329,554.325 cw(c1299.966,553.689) 1299.966,554.589 cw(c1299.966,555.49) P1.7@1299.329,554.853
AD_BUZY: P1.14 | length 26.8
  Top Layer w0.254: v1(1275.41,552.933) v1@1279.601,552.933 ; v1@1279.498,552.933 cw(c1279.498,552.677) v1@1279.679,552.858
  Bottom Layer w0.254: v1(1279.677,552.856) 1287.41,560.589 P1.14@1296.931,560.589 ; P1.14@1296.571,560.23 ccw(c1295.704,559.363) 1295.704,560.589 ccw(c1295.704,561.816) P1.14@1296.571,560.948
AD_CONV: P1.9 P1.10 | length 31.4
  Top Layer w0.254: v1@1274.623,551.231 1280.49,551.231 1285.849,556.589 P1.10@1296.931,556.589 ; v1@1274.698,551.28 ccw(c1274.817,551.399) v1@1274.817,551.231 ; P1.10@1296.532,556.325 ccw(c1295.895,555.689) 1295.895,556.589 ccw(c1295.895,557.49) P1.10@1296.532,556.853
  Bottom Layer w0.254: P1.10@1296.931,556.589 1299.059,556.589 P1.9@1299.286,556.362 ; P1.10@1297.329,556.325 cw(c1297.966,555.689) 1297.966,556.589 cw(c1297.966,557.49) P1.10@1297.329,556.853 ; P1.9@1298.532,556.325 ccw(c1297.895,555.689) 1297.895,556.589 ccw(c1297.895,557.49) P1.9@1298.532,556.853
  other v1: 1279.576,551.231 1274.699,551.282
AD_D0: JP1.18 P1.16 U22.2 | length 108
  Top Layer w0.2: v1@1231.379,564.197 1234.433,561.144 1243.464,561.144 1248.664,566.344 1253.947,566.344 1260.958,559.333 v1(1281.938,559.333) ; 1233.546,555.772 ccw(c1232.932,556.386) JP1.18@1233.705,556.78 ; 1233.74,555.967 ccw(c1233.19,556.517) JP1.18@1233.883,556.871 ; 1233.935,556.161 ccw(c1233.448,556.649) JP1.18@1234.062,556.962 ; 1234.08,556.306 cw(c1234.318,556.068) JP1.18@1234.318,556.405 ; JP1.18@1234.161,556.87 1234.161,556.387 1233.272,555.498 1233.272,544.652 1233.78,544.144 1233.78,541.934 1235.291,540.423 ; v1(1284.707,559.333) 1287.962,562.589 P1.16@1296.931,562.589 ; P1.16@1296.552,562.211 ccw(c1295.639,561.298) 1295.639,562.589 ccw(c1295.639,563.881) P1.16@1296.552,562.967 ; P1.16@1296.694,562.352 ccw(c1296.122,561.78) 1296.122,562.589 ccw(c1296.122,563.398) P1.16@1296.694,562.826
  Bottom Layer w0.2: U22.2@1230.782,565.328 1230.782,564.972 v1(1231.417,564.337) ; JP1.18@1233.832,557.578 ccw(c1232.424,558.985) 1234.415,558.985 ; JP1.18@1233.973,557.437 ccw(c1232.907,558.502) 1234.415,558.502 ; JP1.18@1234.115,557.295 ccw(c1233.39,558.02) 1234.415,558.02 ; JP1.18@1234.318,557.092 1234.415,557.189 v1(1234.415,561.144) ; 1234.415,558.035 ccw(c1235.261,558.035) JP1.18@1234.662,557.437 ; 1234.415,558.518 ccw(c1235.744,558.518) JP1.18@1234.804,557.578 ; v1(1281.938,559.333) v1(1284.707,559.333)
AD_D1: JP1.17 P2.17 U22.3 | length 103.1
  Top Layer w0.2: v1(1230.147,564.617) 1235.685,559.079 1235.685,555.919 JP1.17@1234.318,554.552 v1(1234.318,547.264) ; JP1.17@1233.982,554.004 cw(c1233.171,553.193) 1234.318,553.193 cw(c1235.465,553.193) JP1.17@1234.654,554.004 ; JP1.17@1234.123,554.145 cw(c1233.654,553.676) 1234.318,553.676 cw(c1234.982,553.676) JP1.17@1234.512,554.145 ; JP1.17@1234.318,555.039 ccw(c1234.318,556.216) 1235.15,555.384 ; JP1.17@1234.318,555.239 ccw(c1234.318,556.899) 1235.491,555.725 ; 1234.744,560.173 1244.728,560.173 1249.934,565.379 1253.82,565.379 1260.704,558.495 1282.09,558.495 1286.434,562.839 1286.434,571.043 1286.205,571.271 P2.17@1284.808,571.271 ; JP1.17@1234.793,554.764 cw(c1235.427,554.764) 1234.978,555.213 ; P2.17@1285.224,571.072 cw(c1285.706,570.59) 1285.706,571.271 ; P2.17@1285.365,570.93 cw(c1286.189,570.107) 1286.189,571.271 ; P2.17@1285.365,571.496 ccw(c1285.908,572.038) 1285.908,571.271
  Bottom Layer w0.2: v1(1230.147,564.617) U22.3@1230.147,565.531 ; 1232.383,542.823 1232.383,546.456 1233.191,547.264 v1(1234.318,547.264)
AD_D2: JP1.16 P2.18 U22.5 | length 105
  Top Layer w0.2: v1@1229.021,564.684 v1@1231.738,561.966 ; 1231.056,555.721 ccw(c1230.462,556.315) JP1.16@1231.186,556.743 ; 1231.239,555.904 ccw(c1230.692,556.451) JP1.16@1231.358,556.844 ; 1231.421,556.086 ccw(c1230.921,556.586) JP1.16@1231.53,556.946 ; 1231.604,556.269 ccw(c1231.151,556.722) JP1.16@1231.703,557.048 ; JP1.16@1231.697,556.844 1231.697,556.362 1230.732,555.396 1230.732,544.754 1231.265,544.22 1231.265,541.515 1232.833,539.947 ; v1(1234.745,561.975) 1241.882,561.975 1247.216,567.309 1254.1,567.309 1261.516,559.892 1280.719,559.892 1285.291,564.464 P2.18@1285.291,569.366 ; P2.18@1284.8,568.66 cw(c1283.613,567.474) 1285.291,567.474 ; P2.18@1284.941,568.802 cw(c1284.096,567.957) 1285.291,567.957 ; P2.18@1285.082,568.943 cw(c1284.579,568.44) 1285.291,568.44 ; 1285.291,568.481 cw(c1285.545,568.481) P2.18@1285.365,568.66
  Bottom Layer w0.2: v1@1228.877,564.591 U22.5@1228.877,565.48 ; JP1.16@1231.292,557.578 ccw(c1230.13,558.74) 1231.773,558.74 ; JP1.16@1231.433,557.437 ccw(c1230.613,558.257) 1231.773,558.257 ; JP1.16@1231.773,556.87 1231.773,561.95 v1(1231.748,561.975) v1(1234.745,561.975) ; 1231.773,558.28 ccw(c1232.966,558.28) JP1.16@1232.122,557.437 ; 1231.773,558.763 ccw(c1233.449,558.763) JP1.16@1232.264,557.578
  other v1: 1228.903,564.566